# EAGLE board 13610-SparkFun_ESP32_Power_Control_Shield-.v10-panel (EAGLE 7.5.0), part 1 of 2
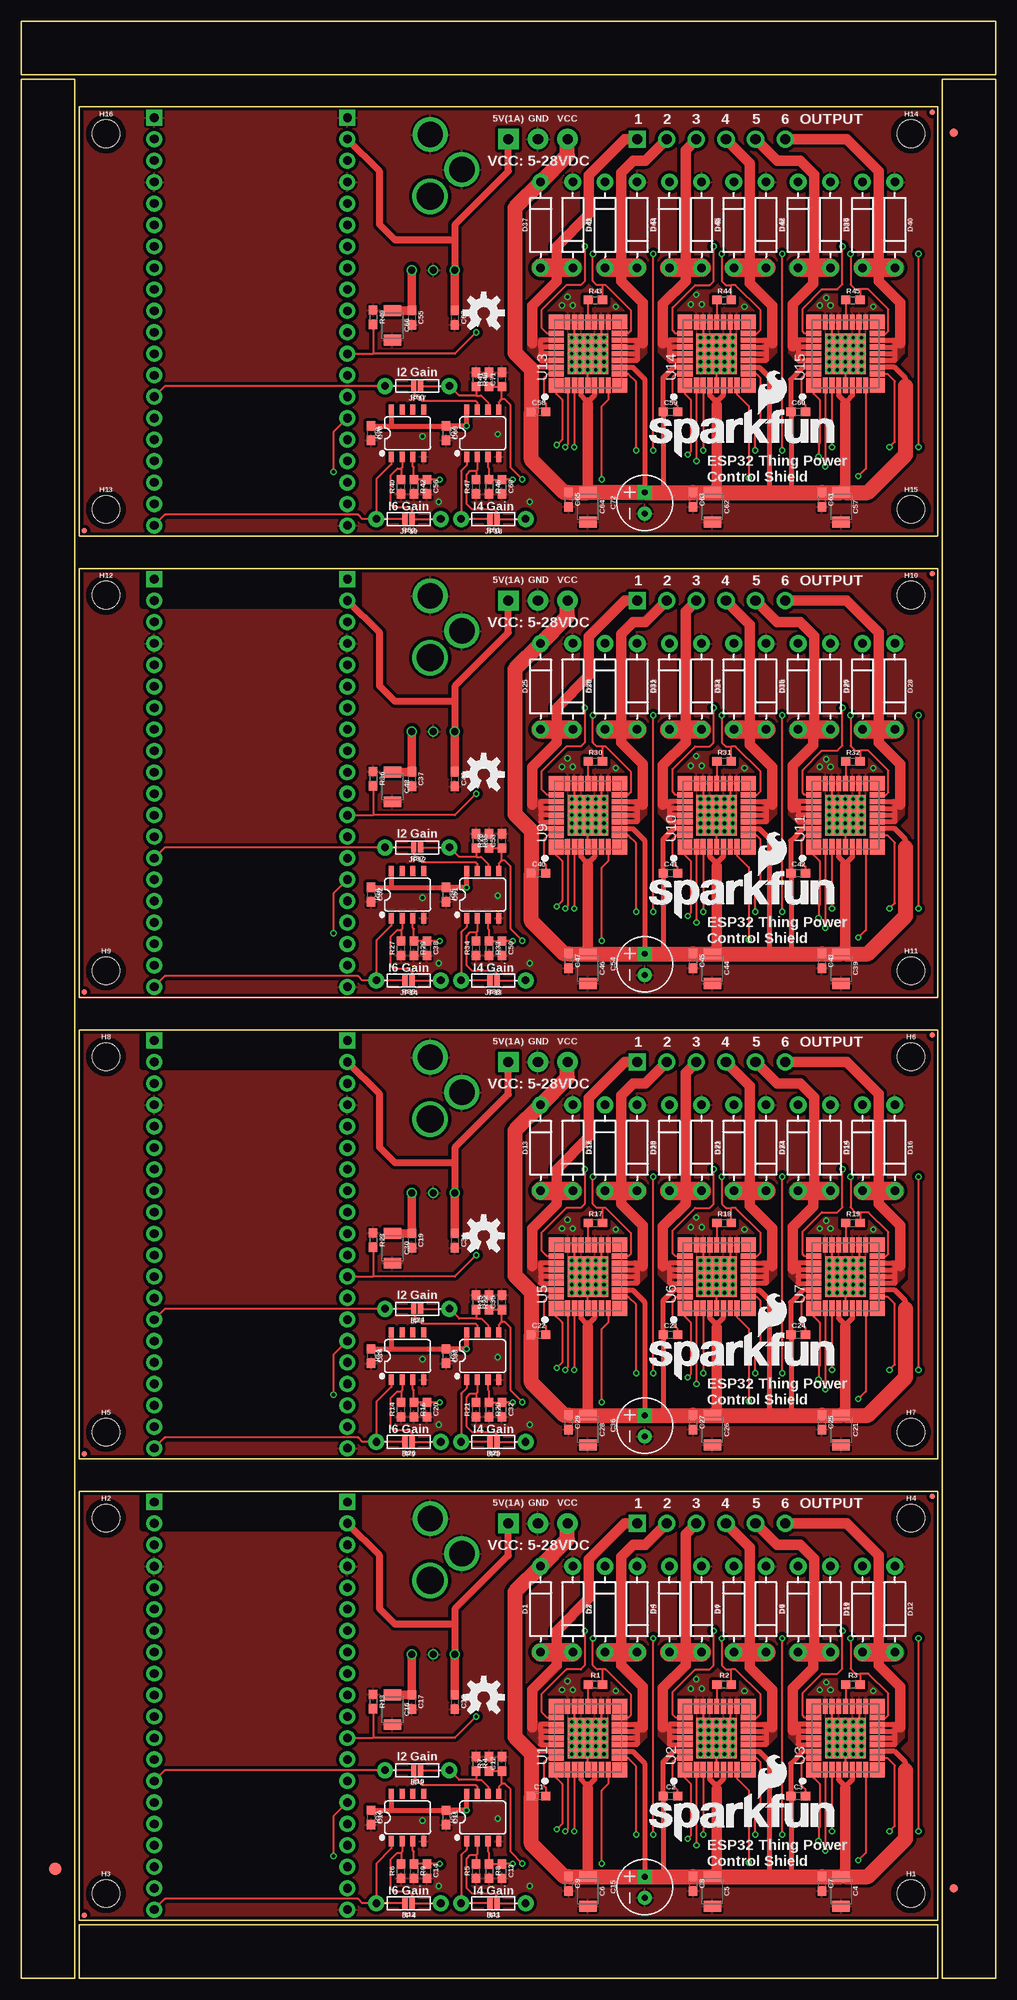
[diagram p0: board, top side]
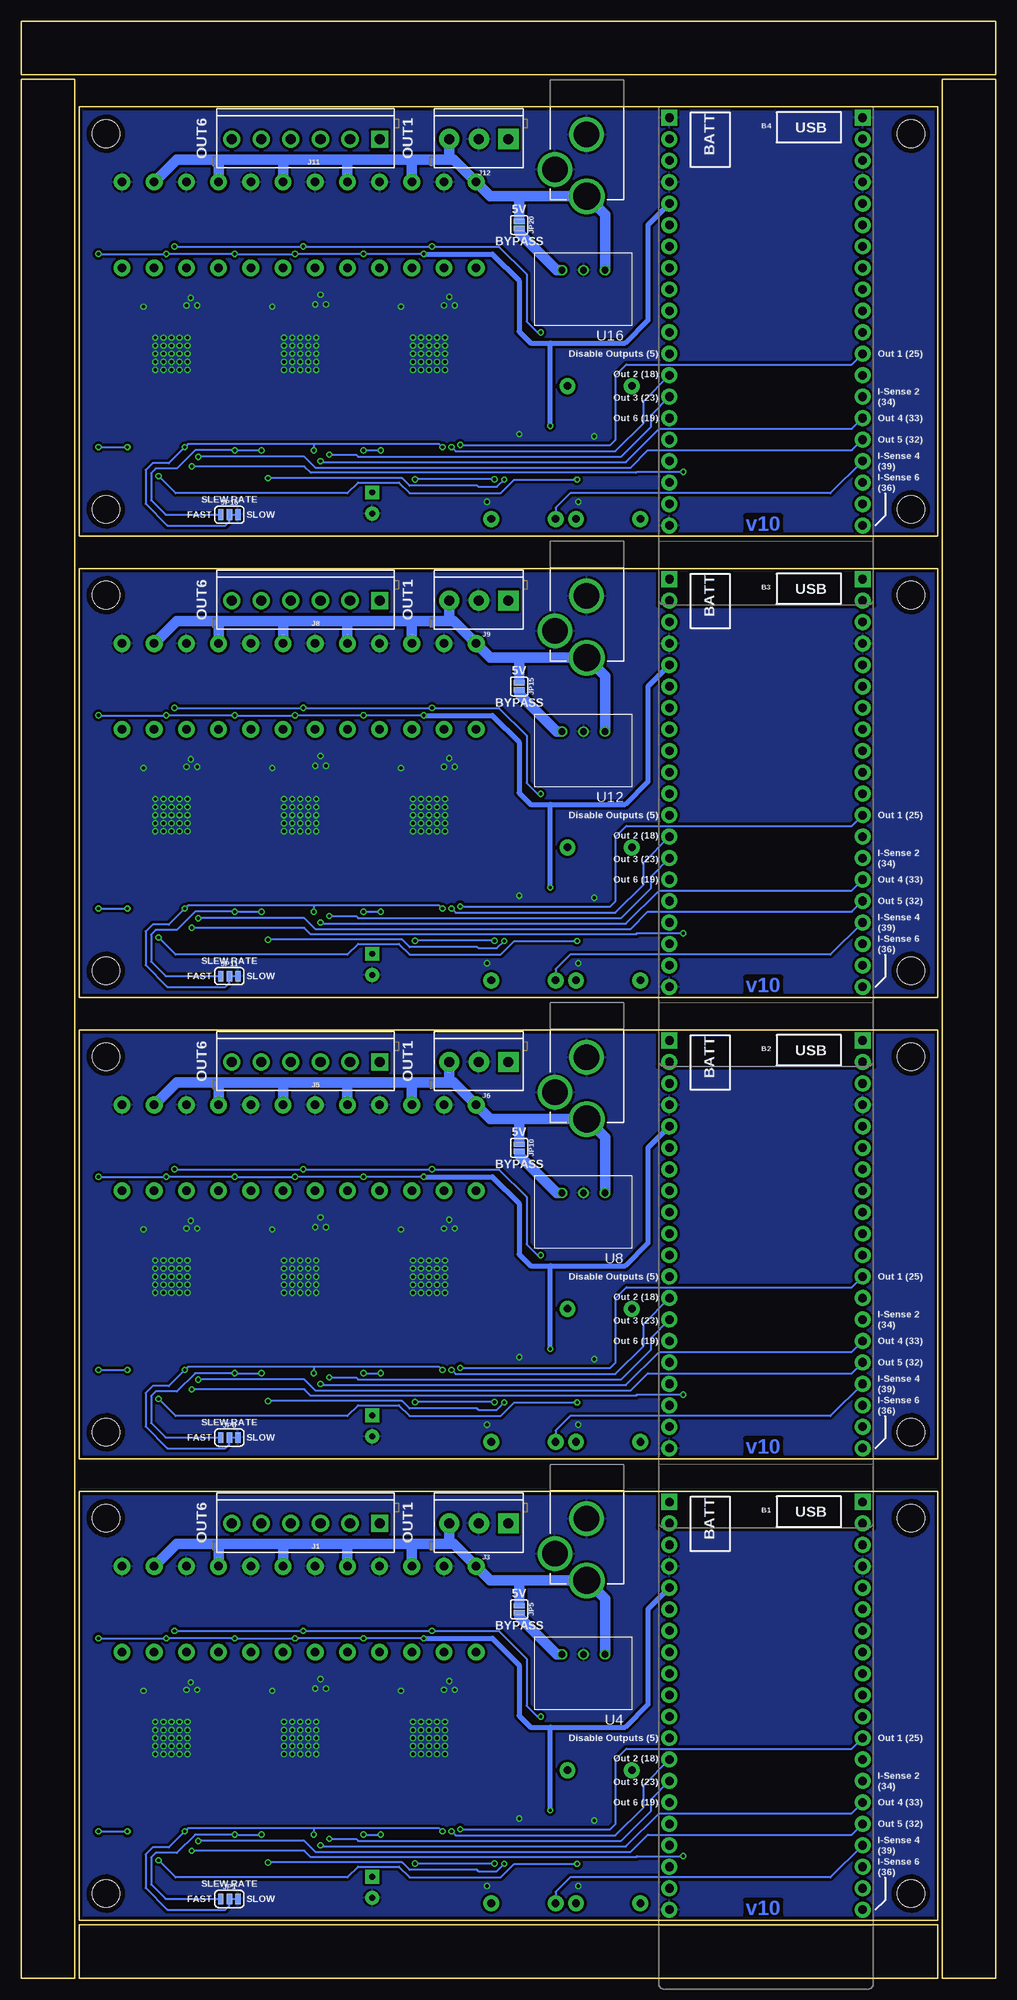
[diagram p1: board, bottom side, seen from below]

Size 115.32 x 231.65 mm. Coordinates in mm from the lower left corner, seen from the top.
Outline: 6.35,77.47 6.35,0 0,0 0,27.94
Outline: 0,25.4 0,224.79 6.35,224.79 6.35,74.93
Outline: 79.25,0 6.86,0 6.86,6.35 29.72,6.35
Outline: 27.18,6.35 108.46,6.35 108.46,0 76.71,0
Outline: 36.07,231.65 115.32,231.65 115.32,225.3 85.6,225.3
Outline: 88.14,225.3 0,225.3 0,231.65 38.61,231.65
Outline: 108.97,159.26 108.97,224.79 115.32,224.79 115.32,208.79
Outline: 115.32,211.33 115.32,0 108.97,0 108.97,161.8
Outline: 6.86,6.86 108.46,6.86 108.46,57.66 6.86,57.66 6.86,6.86
Outline: 6.86,61.47 108.46,61.47 108.46,112.27 6.86,112.27 6.86,61.47
Outline: 6.86,116.08 108.46,116.08 108.46,166.88 6.86,166.88 6.86,116.08
Outline: 6.86,170.69 108.46,170.69 108.46,221.49 6.86,221.49 6.86,170.69
Copper layers (1*16): Top 0.035mm / dielectric 1.5mm / Bottom 0.035mm
Design rules "SparkFun-2-layer-TIGHT": minimum track width 7mil, minimum drill 15mil, track to track 7mil, track to pad 7mil, pad to pad 7mil, via to via 7mil, smd to smd 7mil, copper to edge 7mil, drill to drill 7mil, minimum pad ring 7mil, minimum via ring 7mil, stop-mask expansion 4mil, vias tented up to drill 25mil, thermal gap 10mil

## Footprints (pad centres in the part's own frame; a part is rotated, then mirrored left to right if it is on the bottom)
ESP32_THING = drill 1.016 pad 1.88 square: 1 1.27,1.27; 40 24.13,1.27 | drill 1.016 pad 1.88: 2 1.27,3.81; 3 1.27,6.35; 4 1.27,8.89; 5 1.27,11.43; 6 1.27,13.97; 7 1.27,16.51; 8 1.27,19.05; 9 1.27,21.59; 10 1.27,24.13; 11 1.27,26.67; 12 1.27,29.21; 13 1.27,31.75; 14 1.27,34.29; 15 1.27,36.83; 16 1.27,39.37; 17 1.27,41.91; 18 1.27,44.45; 19 1.27,46.99; 20 1.27,49.53; 21 24.13,49.53; 22 24.13,46.99; 23 24.13,44.45; 24 24.13,41.91; 25 24.13,39.37; 26 24.13,36.83; 27 24.13,34.29; 28 24.13,31.75; 29 24.13,29.21; 30 24.13,26.67; 31 24.13,24.13; 32 24.13,21.59; 33 24.13,19.05; 34 24.13,16.51; 35 24.13,13.97; 36 24.13,11.43; 37 24.13,8.89; 38 24.13,6.35; 39 24.13,3.81
0603 = smd 1.1 x 1: 1 -0.85,0; 2 0.85,0
1210 = smd 1.27 x 2.06: 1 -1.755,0; 2 1.755,0
CPOL-RADIAL-2.5MM-6.5MM = drill 0.7 pad 1.651 square: 1 1.25,0 | drill 0.7 pad 1.651: 2 -1.25,0
DIODE-1N4001 = drill 1 pad 1.981: A -5.08,0; C 5.08,0
FIDUCIAL-1.5X3 = smd 1.5 x 1.5: 1 0,0
FIDUCIAL-1X2 = smd 1 x 1: 1 0,0
FIDUCIAL-MICRO = smd 0.635 x 0.635: 1 0,0
STAND-OFF = hole 3.302: 0,0
SO08 = smd 0.6 x 1.2: 1 -1.905,-2.8; 2 -0.635,-2.8; 3 0.635,-2.8; 4 1.905,-2.8; 5 1.905,2.8; 6 0.635,2.8; 7 -0.635,2.8; 8 -1.905,2.8
SCREWTERMINAL-3.5MM-6 = drill 1.2 pad 2.032 square: 1 0,0 | drill 1.2 pad 2.032: 2 3.5,0; 3 7,0; 4 10.5,0; 5 14,0; 6 17.5,0
POWER_JACK_PTH_LOCK = drill 2.997 pad 4.115: GND 0.025,6.557; GNDBREAK 3.762,10.7 | drill 3.2 pad 4.115: PWR 0,13.878
SCREWTERMINAL-3.5MM-3 = drill 1.2 pad 2.413 square: 1 0,0 | drill 1.2 pad 2.413: 2 3.5,0; 3 7,0
SMT-JUMPER_3_1-NC_TRACE_SILK = smd 0.635 x 1.27: 1 -1.016,0; 2 0,0; 3 1.016,0
SMT-JUMPER_2_NC_PASTE_NO-SILK = smd 0.635 x 1.27: 1 -0.406,0; 2 0.406,0
SMT-JUMPER_2_NO_SILK = smd 0.635 x 1.27: 1 -0.406,0; 2 0.406,0
AXIAL-0.3 = drill 0.9 pad 1.88: P$1 -3.81,0; P$2 3.81,0
32-PQFN = smd 1.75 x 1.75: P$1 -3.754,3.753; P$9 -3.754,-3.767; P$17 3.766,-3.767; P$25 3.766,3.753 | smd 1.8 x 0.635: P$2 -3.74,2.393; P$3 -3.74,1.593; P$4 -3.74,0.793; P$5 -3.74,-0.007; P$6 -3.74,-0.807; P$7 -3.74,-1.607; P$8 -3.74,-2.407; P$18 3.752,-2.407; P$19 3.752,-1.607; P$20 3.752,-0.807; P$21 3.752,-0.007; P$22 3.752,0.793; P$23 3.752,1.593; P$24 3.752,2.393 | smd 0.635 x 1.8: P$10 -2.394,-3.753; P$11 -1.594,-3.753; P$12 -0.794,-3.753; P$13 0.006,-3.753; P$14 0.806,-3.753; P$15 1.606,-3.753; P$16 2.406,-3.753; P$26 2.406,3.739; P$27 1.606,3.739; P$28 0.806,3.739; P$29 0.006,3.739; P$30 -0.794,3.739; P$31 -1.594,3.739; P$32 -2.394,3.739 | smd 4.8 x 4.8: P$33 0.006,-0.007
DC-DC_CONVERTER_78XX = drill 0.8: GND 0,0; VIN -2.54,0; VOUT 2.54,0

## Placement (x,y rotation side)
B1  ESP32_THING  [ESP32_THING]  14.48,57.66 180 bottom
B2  ESP32_THING  [ESP32_THING]  14.48,112.27 180 bottom
B3  ESP32_THING  [ESP32_THING]  14.48,166.88 180 bottom
B4  ESP32_THING  [ESP32_THING]  14.48,221.49 180 bottom
C1  33nF  [0603]  61.21,21.59 0 top
C2  33nF  [0603]  76.83,21.59 0 top
C3  33nF  [0603]  91.95,21.59 0 top
C4  10uF  [1210]  97.03,10.29 270 top
C5  10uF  [1210]  81.79,10.29 270 top
C6  10uF  [1210]  67.06,10.29 270 top
C7  0.1uF  [0603]  94.74,11.19 270 top
C8  0.1uF  [0603]  79.5,11.19 270 top
C9  0.1uF  [0603]  64.77,11.19 270 top
C10  0.1uF  [0603]  41.4,19.05 270 top
C11  0.1uF  [0603]  50.29,19.05 270 top
C12  1.0uF  [0603]  56.9,25.4 90 top
C13  1.0uF  [0603]  56.9,12.7 270 top
C14  1.0uF  [0603]  48.01,12.7 270 top
C15  Ext.  [CPOL-RADIAL-2.5MM-6.5MM]  73.79,10.79 90 top
C16  10uF  [1210]  43.94,31.8 270 top
C17  0.1uF  [0603]  46.23,32.72 270 top
C18  0.1uF  [0603]  51.31,32.72 270 top
C19  0.1uF  [0603]  46.23,87.33 270 top
C20  1.0uF  [0603]  48.01,67.31 270 top
C21  10uF  [1210]  97.03,64.9 270 top
C22  33nF  [0603]  61.21,76.2 0 top
C23  33nF  [0603]  76.83,76.2 0 top
C24  33nF  [0603]  91.95,76.2 0 top
C25  0.1uF  [0603]  94.74,65.8 270 top
C26  10uF  [1210]  81.79,64.9 270 top
C27  0.1uF  [0603]  79.5,65.8 270 top
C28  10uF  [1210]  67.06,64.9 270 top
C29  0.1uF  [0603]  64.77,65.8 270 top
C30  10uF  [1210]  43.94,86.41 270 top
C31  0.1uF  [0603]  51.31,87.33 270 top
C32  1.0uF  [0603]  56.9,67.31 270 top
C33  0.1uF  [0603]  50.29,73.66 270 top
C34  0.1uF  [0603]  41.4,73.66 270 top
C35  1.0uF  [0603]  56.9,80.01 90 top
C36  Ext.  [CPOL-RADIAL-2.5MM-6.5MM]  73.79,65.41 90 top
C37  0.1uF  [0603]  46.23,141.94 270 top
C38  1.0uF  [0603]  48.01,121.92 270 top
C39  10uF  [1210]  97.03,119.51 270 top
C40  33nF  [0603]  61.21,130.81 0 top
C41  33nF  [0603]  76.83,130.81 0 top
C42  33nF  [0603]  91.95,130.81 0 top
C43  0.1uF  [0603]  94.74,120.41 270 top
C44  10uF  [1210]  81.79,119.51 270 top
C45  0.1uF  [0603]  79.5,120.41 270 top
C46  10uF  [1210]  67.06,119.51 270 top
C47  0.1uF  [0603]  64.77,120.41 270 top
C48  10uF  [1210]  43.94,141.02 270 top
C49  0.1uF  [0603]  51.31,141.94 270 top
C50  1.0uF  [0603]  56.9,121.92 270 top
C51  0.1uF  [0603]  50.29,128.27 270 top
C52  0.1uF  [0603]  41.4,128.27 270 top
C53  1.0uF  [0603]  56.9,134.62 90 top
C54  Ext.  [CPOL-RADIAL-2.5MM-6.5MM]  73.79,120.02 90 top
C55  0.1uF  [0603]  46.23,196.55 270 top
C56  1.0uF  [0603]  48.01,176.53 270 top
C57  10uF  [1210]  97.03,174.12 270 top
C58  33nF  [0603]  61.21,185.42 0 top
C59  33nF  [0603]  76.83,185.42 0 top
C60  33nF  [0603]  91.95,185.42 0 top
C61  0.1uF  [0603]  94.74,175.02 270 top
C62  10uF  [1210]  81.79,174.12 270 top
C63  0.1uF  [0603]  79.5,175.02 270 top
C64  10uF  [1210]  67.06,174.12 270 top
C65  0.1uF  [0603]  64.77,175.02 270 top
C66  10uF  [1210]  43.94,195.63 270 top
C67  0.1uF  [0603]  51.31,196.55 270 top
C68  1.0uF  [0603]  56.9,176.53 270 top
C69  0.1uF  [0603]  50.29,182.88 270 top
C70  0.1uF  [0603]  41.4,182.88 270 top
C71  1.0uF  [0603]  56.9,189.23 90 top
C72  Ext.  [CPOL-RADIAL-2.5MM-6.5MM]  73.79,174.62 90 top
D1  1N4001  [DIODE-1N4001]  61.47,43.69 90 top
D2  1N4001  [DIODE-1N4001]  65.28,43.69 270 top
D3  1N4001  [DIODE-1N4001]  69.09,43.69 90 top
D4  1N4001  [DIODE-1N4001]  72.9,43.69 270 top
D5  1N4001  [DIODE-1N4001]  76.71,43.69 90 top
D6  1N4001  [DIODE-1N4001]  80.52,43.69 270 top
D7  1N4001  [DIODE-1N4001]  84.33,43.69 90 top
D8  1N4001  [DIODE-1N4001]  88.14,43.69 270 top
D9  1N4001  [DIODE-1N4001]  91.95,43.69 90 top
D10  1N4001  [DIODE-1N4001]  95.76,43.69 270 top
D11  1N4001  [DIODE-1N4001]  99.57,43.69 90 top
D12  1N4001  [DIODE-1N4001]  103.38,43.69 270 top
D13  1N4001  [DIODE-1N4001]  61.47,98.3 90 top
D14  1N4001  [DIODE-1N4001]  95.76,98.3 270 top
D15  1N4001  [DIODE-1N4001]  99.57,98.3 90 top
D16  1N4001  [DIODE-1N4001]  103.38,98.3 270 top
D17  1N4001  [DIODE-1N4001]  65.28,98.3 270 top
D18  1N4001  [DIODE-1N4001]  69.09,98.3 90 top
D19  1N4001  [DIODE-1N4001]  72.9,98.3 270 top
D20  1N4001  [DIODE-1N4001]  76.71,98.3 90 top
D21  1N4001  [DIODE-1N4001]  80.52,98.3 270 top
D22  1N4001  [DIODE-1N4001]  84.33,98.3 90 top
D23  1N4001  [DIODE-1N4001]  88.14,98.3 270 top
D24  1N4001  [DIODE-1N4001]  91.95,98.3 90 top
D25  1N4001  [DIODE-1N4001]  61.47,152.91 90 top
D26  1N4001  [DIODE-1N4001]  95.76,152.91 270 top
D27  1N4001  [DIODE-1N4001]  99.57,152.91 90 top
D28  1N4001  [DIODE-1N4001]  103.38,152.91 270 top
D29  1N4001  [DIODE-1N4001]  65.28,152.91 270 top
D30  1N4001  [DIODE-1N4001]  69.09,152.91 90 top
D31  1N4001  [DIODE-1N4001]  72.9,152.91 270 top
D32  1N4001  [DIODE-1N4001]  76.71,152.91 90 top
D33  1N4001  [DIODE-1N4001]  80.52,152.91 270 top
D34  1N4001  [DIODE-1N4001]  84.33,152.91 90 top
D35  1N4001  [DIODE-1N4001]  88.14,152.91 270 top
D36  1N4001  [DIODE-1N4001]  91.95,152.91 90 top
D37  1N4001  [DIODE-1N4001]  61.47,207.52 90 top
D38  1N4001  [DIODE-1N4001]  95.76,207.52 270 top
D39  1N4001  [DIODE-1N4001]  99.57,207.52 90 top
D40  1N4001  [DIODE-1N4001]  103.38,207.52 270 top
D41  1N4001  [DIODE-1N4001]  65.28,207.52 270 top
D42  1N4001  [DIODE-1N4001]  69.09,207.52 90 top
D43  1N4001  [DIODE-1N4001]  72.9,207.52 270 top
D44  1N4001  [DIODE-1N4001]  76.71,207.52 90 top
D45  1N4001  [DIODE-1N4001]  80.52,207.52 270 top
D46  1N4001  [DIODE-1N4001]  84.33,207.52 90 top
D47  1N4001  [DIODE-1N4001]  88.14,207.52 270 top
D48  1N4001  [DIODE-1N4001]  91.95,207.52 90 top
E$1  [FIDUCIAL-1.5X3]  4.06,12.95 0 top
E$7  [FIDUCIAL-1X2]  110.36,218.44 180 top
E$8  [FIDUCIAL-1X2]  110.36,10.67 0 top
FD1  FIDUCIALUFIDUCIAL  [FIDUCIAL-MICRO]  107.82,57.02 0 top
FD2  FIDUCIALUFIDUCIAL  [FIDUCIAL-MICRO]  7.49,7.49 0 top
FD3  FIDUCIALUFIDUCIAL  [FIDUCIAL-MICRO]  107.82,111.63 0 top
FD4  FIDUCIALUFIDUCIAL  [FIDUCIAL-MICRO]  7.49,62.1 0 top
FD5  FIDUCIALUFIDUCIAL  [FIDUCIAL-MICRO]  107.82,166.24 0 top
FD6  FIDUCIALUFIDUCIAL  [FIDUCIAL-MICRO]  7.49,116.71 0 top
FD7  FIDUCIALUFIDUCIAL  [FIDUCIAL-MICRO]  107.82,220.85 0 top
FD8  FIDUCIALUFIDUCIAL  [FIDUCIAL-MICRO]  7.49,171.32 0 top
H1  STAND-OFF  [STAND-OFF]  105.28,10.03 0 top
H2  STAND-OFF  [STAND-OFF]  10.03,54.48 0 top
H3  STAND-OFF  [STAND-OFF]  10.03,10.03 0 top
H4  STAND-OFF  [STAND-OFF]  105.28,54.48 0 top
H5  STAND-OFF  [STAND-OFF]  10.03,64.64 0 top
H6  STAND-OFF  [STAND-OFF]  105.28,109.09 0 top
H7  STAND-OFF  [STAND-OFF]  105.28,64.64 0 top
H8  STAND-OFF  [STAND-OFF]  10.03,109.09 0 top
H9  STAND-OFF  [STAND-OFF]  10.03,119.25 0 top
H10  STAND-OFF  [STAND-OFF]  105.28,163.7 0 top
H11  STAND-OFF  [STAND-OFF]  105.28,119.25 0 top
H12  STAND-OFF  [STAND-OFF]  10.03,163.7 0 top
H13  STAND-OFF  [STAND-OFF]  10.03,173.86 0 top
H14  STAND-OFF  [STAND-OFF]  105.28,218.31 0 top
H15  STAND-OFF  [STAND-OFF]  105.28,173.86 0 top
H16  STAND-OFF  [STAND-OFF]  10.03,218.31 0 top
IC1  LMV358  [SO08]  54.61,19.05 0 top
IC2  LMV358  [SO08]  45.72,19.05 0 top
IC3  LMV358  [SO08]  54.61,73.66 0 top
IC4  LMV358  [SO08]  45.72,73.66 0 top
IC5  LMV358  [SO08]  54.61,128.27 0 top
IC6  LMV358  [SO08]  45.72,128.27 0 top
IC7  LMV358  [SO08]  54.61,182.88 0 top
IC8  LMV358  [SO08]  45.72,182.88 0 top
J1  [SCREWTERMINAL-3.5MM-6]  72.9,53.85 180 bottom
J2  POWER_JACKPTH_LOCK  [POWER_JACK_PTH_LOCK]  48.39,60.96 180 bottom
J3  [SCREWTERMINAL-3.5MM-3]  57.66,53.85 180 bottom
J4  POWER_JACKPTH_LOCK  [POWER_JACK_PTH_LOCK]  48.39,115.57 180 bottom
J5  [SCREWTERMINAL-3.5MM-6]  72.9,108.46 180 bottom
J6  [SCREWTERMINAL-3.5MM-3]  57.66,108.46 180 bottom
J7  POWER_JACKPTH_LOCK  [POWER_JACK_PTH_LOCK]  48.39,170.18 180 bottom
J8  [SCREWTERMINAL-3.5MM-6]  72.9,163.07 180 bottom
J9  [SCREWTERMINAL-3.5MM-3]  57.66,163.07 180 bottom
J10  POWER_JACKPTH_LOCK  [POWER_JACK_PTH_LOCK]  48.39,224.79 180 bottom
J11  [SCREWTERMINAL-3.5MM-6]  72.9,217.68 180 bottom
J12  [SCREWTERMINAL-3.5MM-3]  57.66,217.68 180 bottom
JP1  [SMT-JUMPER_3_1-NC_TRACE_SILK]  90.68,9.4 0 bottom
JP2  [SMT-JUMPER_2_NC_PASTE_NO-SILK]  46.86,24.64 180 top
JP3  [SMT-JUMPER_2_NC_PASTE_NO-SILK]  55.88,8.89 180 top
JP4  [SMT-JUMPER_2_NC_PASTE_NO-SILK]  45.85,8.89 180 top
JP5  5V Bypass  [SMT-JUMPER_2_NO_SILK]  56.39,43.69 270 bottom
JP6  [SMT-JUMPER_3_1-NC_TRACE_SILK]  90.68,64.01 0 bottom
JP7  [SMT-JUMPER_2_NC_PASTE_NO-SILK]  46.86,79.25 180 top
JP8  [SMT-JUMPER_2_NC_PASTE_NO-SILK]  55.88,63.5 180 top
JP9  [SMT-JUMPER_2_NC_PASTE_NO-SILK]  45.85,63.5 180 top
JP10  5V Bypass  [SMT-JUMPER_2_NO_SILK]  56.39,98.3 270 bottom
JP11  [SMT-JUMPER_3_1-NC_TRACE_SILK]  90.68,118.62 0 bottom
JP12  [SMT-JUMPER_2_NC_PASTE_NO-SILK]  46.86,133.86 180 top
JP13  [SMT-JUMPER_2_NC_PASTE_NO-SILK]  55.88,118.11 180 top
JP14  [SMT-JUMPER_2_NC_PASTE_NO-SILK]  45.85,118.11 180 top
JP15  5V Bypass  [SMT-JUMPER_2_NO_SILK]  56.39,152.91 270 bottom
JP16  [SMT-JUMPER_3_1-NC_TRACE_SILK]  90.68,173.23 0 bottom
JP17  [SMT-JUMPER_2_NC_PASTE_NO-SILK]  46.86,188.47 180 top
JP18  [SMT-JUMPER_2_NC_PASTE_NO-SILK]  55.88,172.72 180 top
JP19  [SMT-JUMPER_2_NC_PASTE_NO-SILK]  45.85,172.72 180 top
JP20  5V Bypass  [SMT-JUMPER_2_NO_SILK]  56.39,207.52 270 bottom
LOGO1  SFE_LOGO_NAME_FLAME.2_INCH  [SFE_LOGO_NAME_FLAME_.2]  73.66,16.13 0 top
LOGO2  OSHW-LOGOM  [OSHW-LOGO-M]  54.74,33.27 0 top
LOGO3  SFE_LOGO_NAME_FLAME.2_INCH  [SFE_LOGO_NAME_FLAME_.2]  73.66,70.74 0 top
LOGO4  OSHW-LOGOM  [OSHW-LOGO-M]  54.74,87.88 0 top
LOGO5  SFE_LOGO_NAME_FLAME.2_INCH  [SFE_LOGO_NAME_FLAME_.2]  73.66,125.35 0 top
LOGO6  OSHW-LOGOM  [OSHW-LOGO-M]  54.74,142.49 0 top
LOGO7  SFE_LOGO_NAME_FLAME.2_INCH  [SFE_LOGO_NAME_FLAME_.2]  73.66,179.96 0 top
LOGO8  OSHW-LOGOM  [OSHW-LOGO-M]  54.74,197.1 0 top
R1  10k  [0603]  67.94,34.8 0 top
R2  10k  [0603]  83.19,34.8 0 top
R3  10k  [0603]  98.42,34.8 0 top
R4  10k  [0603]  53.85,25.4 270 top
R5  10k  [0603]  53.85,12.7 90 top
R6  10k  [0603]  44.96,12.7 90 top
R7  220  [0603]  55.37,25.4 90 top
R8  220  [0603]  55.37,12.7 270 top
R9  220  [0603]  46.48,12.7 270 top
R10  [AXIAL-0.3]  46.86,24.64 180 top
R11  [AXIAL-0.3]  55.88,8.89 180 top
R12  [AXIAL-0.3]  45.85,8.89 180 top
R13  10k  [0603]  41.66,32.77 270 top
R14  10k  [0603]  44.96,67.31 90 top
R15  220  [0603]  55.37,80.01 90 top
R16  220  [0603]  46.48,67.31 270 top
R17  10k  [0603]  67.94,89.41 0 top
R18  10k  [0603]  83.19,89.41 0 top
R19  10k  [0603]  98.42,89.41 0 top
R20  220  [0603]  55.37,67.31 270 top
R21  10k  [0603]  53.85,67.31 90 top
R22  10k  [0603]  53.85,80.01 270 top
R23  10k  [0603]  41.66,87.38 270 top
R24  [AXIAL-0.3]  46.86,79.25 180 top
R25  [AXIAL-0.3]  55.88,63.5 180 top
R26  [AXIAL-0.3]  45.85,63.5 180 top
R27  10k  [0603]  44.96,121.92 90 top
R28  220  [0603]  55.37,134.62 90 top
R29  220  [0603]  46.48,121.92 270 top
R30  10k  [0603]  67.94,144.02 0 top
R31  10k  [0603]  83.19,144.02 0 top
R32  10k  [0603]  98.42,144.02 0 top
R33  220  [0603]  55.37,121.92 270 top
R34  10k  [0603]  53.85,121.92 90 top
R35  10k  [0603]  53.85,134.62 270 top
R36  10k  [0603]  41.66,141.99 270 top
R37  [AXIAL-0.3]  46.86,133.86 180 top
R38  [AXIAL-0.3]  55.88,118.11 180 top
R39  [AXIAL-0.3]  45.85,118.11 180 top
R40  10k  [0603]  44.96,176.53 90 top
R41  220  [0603]  55.37,189.23 90 top
R42  220  [0603]  46.48,176.53 270 top
R43  10k  [0603]  67.94,198.63 0 top
R44  10k  [0603]  83.19,198.63 0 top
R45  10k  [0603]  98.42,198.63 0 top
R46  220  [0603]  55.37,176.53 270 top
R47  10k  [0603]  53.85,176.53 90 top
R48  10k  [0603]  53.85,189.23 270 top
R49  10k  [0603]  41.66,196.6 270 top
R50  [AXIAL-0.3]  46.86,188.47 180 top
R51  [AXIAL-0.3]  55.88,172.72 180 top
R52  [AXIAL-0.3]  45.85,172.72 180 top
U1  MC33926  [32-PQFN]  67.06,28.45 90 top
U2  MC33926  [32-PQFN]  82.3,28.45 90 top
U3  MC33926  [32-PQFN]  97.54,28.45 90 top
U4  R-78E5.0-1.0  [DC-DC_CONVERTER_78XX]  48.77,38.35 180 bottom
U5  MC33926  [32-PQFN]  67.06,83.06 90 top
U6  MC33926  [32-PQFN]  82.3,83.06 90 top
U7  MC33926  [32-PQFN]  97.54,83.06 90 top
U8  R-78E5.0-1.0  [DC-DC_CONVERTER_78XX]  48.77,92.96 180 bottom
U9  MC33926  [32-PQFN]  67.06,137.67 90 top
U10  MC33926  [32-PQFN]  82.3,137.67 90 top
U11  MC33926  [32-PQFN]  97.54,137.67 90 top
U12  R-78E5.0-1.0  [DC-DC_CONVERTER_78XX]  48.77,147.57 180 bottom
U13  MC33926  [32-PQFN]  67.06,192.28 90 top
U14  MC33926  [32-PQFN]  82.3,192.28 90 top
U15  MC33926  [32-PQFN]  97.54,192.28 90 top
U16  R-78E5.0-1.0  [DC-DC_CONVERTER_78XX]  48.77,202.18 180 bottom

## Library data of the parts
B1-B4 = SparkFun-Boards; SF_ID: DEV-13907
C1-C3 C22-C24 C40-C42 C58-C60 = SparkFun-Capacitors; PROD_ID: CAP-07887
C4-C6 C16 C21 C26 C28 C30 C39 C44 C46 C48 C57 C62 C64 C66 = SparkFun-Capacitors; PROD_ID: CAP-09824
C7-C11 C17-C19 C25 C27 C29 C31 C33 C34 C37 C43 C45 C47 C49 C51 C52 C55 C61 C63 C65 C67 C69 C70 = SparkFun-Capacitors; PROD_ID: CAP-08390
C12-C14 C20 C32 C35 C38 C50 C53 C56 C68 C71 = SparkFun-Capacitors; PROD_ID: CAP-00868
C15 C36 C54 C72 = SparkFun-Capacitors; PROD_ID: CAP-08439
D1-D48 = SparkFun-DiscreteSemi; PROD_ID: DIO-09176
E$1 = SparkFun-Retired
E$7 E$8 FD1-FD8 LOGO1-LOGO8 = SparkFun-Aesthetics
H1-H16 = SparkFun-Hardware
IC1-IC8 = SparkFun-IC-Amplifiers; PROD_ID: IC-09657
J1 J5 J8 J11 = SparkFun-Connectors; PROD_ID: CONN-13617
J2 J4 J7 J10 = SparkFun-Connectors; PROD_ID: CONN-08197; SF_ID: PRT-00119
J3 J6 J9 J12 = SparkFun-Connectors; PROD_ID: CONN-08288; SF_ID: PRT-08235
JP1-JP20 = SparkFun-Jumpers
R1-R6 R13 R14 R17-R19 R21-R23 R27 R30-R32 R34-R36 R40 R43-R45 R47-R49 = SparkFun-Resistors; PROD_ID: RES-00824
R7-R9 R15 R16 R20 R28 R29 R33 R41 R42 R46 = SparkFun-Resistors; PROD_ID: RES-07861
R10-R12 R24-R26 R37-R39 R50-R52 = SparkFun-Resistors; PROD_ID: RES-12182
U1-U3 U5-U7 U9-U11 U13-U15 = SparkFun_ESP32_Power_Control_Shield_Temp; PROD_ID: IC-13616
U4 U8 U12 U16 = SparkFun-IC-Power; PROD_ID: COM-13655

## Nets
3.3V: B1.36 C10.1 C11.1 IC1.8 IC2.8 JP1.1 R1.2 R2.2 R3.2 U1.P$10 U1.P$16 U2.P$10 U2.P$16 U3.P$10 U3.P$16
3.3V1: B2.36 C33.1 C34.1 IC3.8 IC4.8 JP6.1 R17.2 R18.2 R19.2 U5.P$10 U5.P$16 U6.P$10 U6.P$16 U7.P$10 U7.P$16
3.3V2: B3.36 C51.1 C52.1 IC5.8 IC6.8 JP11.1 R30.2 R31.2 R32.2 U9.P$10 U9.P$16 U10.P$10 U10.P$16 U11.P$10 U11.P$16
3.3V3: B4.36 C69.1 C70.1 IC7.8 IC8.8 JP16.1 R43.2 R44.2 R45.2 U13.P$10 U13.P$16 U14.P$10 U14.P$16 U15.P$10 U15.P$16
5V: B1.39 C18.1 J3.1 JP5.2 U4.VOUT
5V1: B2.39 C31.1 J6.1 JP10.2 U8.VOUT
5V2: B3.39 C49.1 J9.1 JP15.2 U12.VOUT
5V3: B4.39 C67.1 J12.1 JP20.2 U16.VOUT
CTRL_1: B1.12 U1.P$1
CTRL_2: B1.28 U1.P$2
CTRL_3: B1.27 U2.P$1
CTRL_4: B1.15 U2.P$2
CTRL_5: B1.16 U3.P$1
CTRL_6: B1.26 U3.P$2
CTRL_7: B2.26 U7.P$2
CTRL_8: B2.16 U7.P$1
CTRL_9: B2.15 U6.P$2
CTRL_10: B2.27 U6.P$1
CTRL_11: B2.28 U5.P$2
CTRL_12: B2.12 U5.P$1
CTRL_13: B3.26 U11.P$2
CTRL_14: B3.16 U11.P$1
CTRL_15: B3.15 U10.P$2
CTRL_16: B3.27 U10.P$1
CTRL_17: B3.28 U9.P$2
CTRL_18: B3.12 U9.P$1
CTRL_19: B4.26 U15.P$2
CTRL_20: B4.16 U15.P$1
CTRL_21: B4.15 U14.P$2
CTRL_22: B4.27 U14.P$1
CTRL_23: B4.28 U13.P$2
CTRL_24: B4.12 U13.P$1
D1: B1.29 R13.2 U1.P$26 U2.P$26 U3.P$26
D2: B2.29 R23.2 U5.P$26 U6.P$26 U7.P$26
D3: B3.29 R36.2 U9.P$26 U10.P$26 U11.P$26
D4: B4.29 R49.2 U13.P$26 U14.P$26 U15.P$26
FB1: B2.20 IC4.1 JP9.2 R26.P$2
FB2: B1.14 IC1.7 JP2.2 R10.P$2
FB3: B2.17 IC3.1 JP8.2 R25.P$2
FB4: B1.17 IC1.1 JP3.2 R11.P$2
FB5: B2.14 IC3.7 JP7.2 R24.P$2
FB6: B1.20 IC2.1 JP4.2 R12.P$2
FB7: B3.20 IC6.1 JP14.2 R39.P$2
FB8: B3.17 IC5.1 JP13.2 R38.P$2
FB9: B3.14 IC5.7 JP12.2 R37.P$2
FB10: B4.20 IC8.1 JP19.2 R52.P$2
FB11: B4.17 IC7.1 JP18.2 R51.P$2
FB12: B4.14 IC7.7 JP17.2 R50.P$2
GND: B1.1 B1.4 B1.21 B1.37 B1.40 C4.2 C5.2 C6.2 C7.2 C8.2 C9.2 C10.2 C11.2 C12.2 C13.2 C14.2 C15.2 C16.2 C17.2 C18.2 D2.A D4.A D6.A D8.A D10.A D12.A IC1.4 IC2.4 J2.GND J2.GNDBREAK J3.2 JP1.3 R4.1 R5.1 R6.1 R7.2 R8.2 R9.2 R13.1 U1.P$5 U1.P$18 U1.P$19 U1.P$20 U1.P$22 U1.P$23 U1.P$24 U1.P$33 U2.P$5 U2.P$18 U2.P$19 U2.P$20 U2.P$22 U2.P$23 U2.P$24 U2.P$33 U3.P$5 U3.P$18 U3.P$19 U3.P$20 U3.P$22 U3.P$23 U3.P$24 U3.P$33 U4.GND
GND1: B2.1 B2.4 B2.21 B2.37 B2.40 C19.2 C20.2 C21.2 C25.2 C26.2 C27.2 C28.2 C29.2 C30.2 C31.2 C32.2 C33.2 C34.2 C35.2 C36.2 D14.A D16.A D17.A D19.A D21.A D23.A IC3.4 IC4.4 J4.GND J4.GNDBREAK J6.2 JP6.3 R14.1 R15.2 R16.2 R20.2 R21.1 R22.1 R23.1 U5.P$5 U5.P$18 U5.P$19 U5.P$20 U5.P$22 U5.P$23 U5.P$24 U5.P$33 U6.P$5 U6.P$18 U6.P$19 U6.P$20 U6.P$22 U6.P$23 U6.P$24 U6.P$33 U7.P$5 U7.P$18 U7.P$19 U7.P$20 U7.P$22 U7.P$23 U7.P$24 U7.P$33 U8.GND
GND2: B3.1 B3.4 B3.21 B3.37 B3.40 C37.2 C38.2 C39.2 C43.2 C44.2 C45.2 C46.2 C47.2 C48.2 C49.2 C50.2 C51.2 C52.2 C53.2 C54.2 D26.A D28.A D29.A D31.A D33.A D35.A IC5.4 IC6.4 J7.GND J7.GNDBREAK J9.2 JP11.3 R27.1 R28.2 R29.2 R33.2 R34.1 R35.1 R36.1 U9.P$5 U9.P$18 U9.P$19 U9.P$20 U9.P$22 U9.P$23 U9.P$24 U9.P$33 U10.P$5 U10.P$18 U10.P$19 U10.P$20 U10.P$22 U10.P$23 U10.P$24 U10.P$33 U11.P$5 U11.P$18 U11.P$19 U11.P$20 U11.P$22 U11.P$23 U11.P$24 U11.P$33 U12.GND
GND3: B4.1 B4.4 B4.21 B4.37 B4.40 C55.2 C56.2 C57.2 C61.2 C62.2 C63.2 C64.2 C65.2 C66.2 C67.2 C68.2 C69.2 C70.2 C71.2 C72.2 D38.A D40.A D41.A D43.A D45.A D47.A IC7.4 IC8.4 J10.GND J10.GNDBREAK J12.2 JP16.3 R40.1 R41.2 R42.2 R46.2 R47.1 R48.1 R49.1 U13.P$5 U13.P$18 U13.P$19 U13.P$20 U13.P$22 U13.P$23 U13.P$24 U13.P$33 U14.P$5 U14.P$18 U14.P$19 U14.P$20 U14.P$22 U14.P$23 U14.P$24 U14.P$33 U15.P$5 U15.P$18 U15.P$19 U15.P$20 U15.P$22 U15.P$23 U15.P$24 U15.P$33 U16.GND
I_SENSE1: C12.1 IC1.5 R7.1 U1.P$8
I_SENSE2: C13.1 IC1.3 R8.1 U2.P$8
I_SENSE3: C14.1 IC2.3 R9.1 U3.P$8
I_SENSE4: C35.1 IC3.5 R15.1 U5.P$8
I_SENSE5: C32.1 IC3.3 R20.1 U6.P$8
I_SENSE6: C20.1 IC4.3 R16.1 U7.P$8
I_SENSE7: C53.1 IC5.5 R28.1 U9.P$8
I_SENSE8: C50.1 IC5.3 R33.1 U10.P$8
I_SENSE9: C38.1 IC6.3 R29.1 U11.P$8
I_SENSE10: C71.1 IC7.5 R41.1 U13.P$8
I_SENSE11: C68.1 IC7.3 R46.1 U14.P$8
I_SENSE12: C56.1 IC8.3 R42.1 U15.P$8
N$1: R17.1 U5.P$21
N$2: IC1.6 JP2.1 R4.2 R10.P$1
N$3: C22.2 U5.P$32
N$4: IC2.2 JP4.1 R6.2 R12.P$1
N$5: IC1.2 JP3.1 R5.2 R11.P$1
N$6: R2.1 U2.P$21
N$7: C2.2 U2.P$32
N$8: R18.1 U6.P$21
N$9: R3.1 U3.P$21
N$10: R1.1 U1.P$21
N$11: C1.2 U1.P$32
N$12: C3.2 U3.P$32
N$13: C23.2 U6.P$32
N$14: R19.1 U7.P$21
N$15: C24.2 U7.P$32
N$16: IC3.2 JP8.1 R21.2 R25.P$1
N$17: IC3.6 JP7.1 R22.2 R24.P$1
N$18: IC4.2 JP9.1 R14.2 R26.P$1
N$19: R30.1 U9.P$21
N$20: C40.2 U9.P$32
N$21: R31.1 U10.P$21
N$22: C41.2 U10.P$32
N$23: R32.1 U11.P$21
N$24: C42.2 U11.P$32
N$25: IC5.2 JP13.1 R34.2 R38.P$1
N$26: IC5.6 JP12.1 R35.2 R37.P$1
N$27: IC6.2 JP14.1 R27.2 R39.P$1
N$28: R43.1 U13.P$21
N$29: C58.2 U13.P$32
N$30: R44.1 U14.P$21
N$31: C59.2 U14.P$32
N$32: R45.1 U15.P$21
N$33: C60.2 U15.P$32
N$34: IC7.2 JP18.1 R47.2 R51.P$1
N$35: IC7.6 JP17.1 R48.2 R50.P$1
N$36: IC8.2 JP19.1 R40.2 R52.P$1
P_OUT1: D1.A D2.C J1.1 U1.P$27 U1.P$28 U1.P$29 U1.P$30
P_OUT2: D3.A D4.C J1.2 U1.P$12 U1.P$13 U1.P$14 U1.P$15
P_OUT3: D5.A D6.C J1.3 U2.P$27 U2.P$28 U2.P$29 U2.P$30
P_OUT4: D7.A D8.C J1.4 U2.P$12 U2.P$13 U2.P$14 U2.P$15
P_OUT5: D9.A D10.C J1.5 U3.P$27 U3.P$28 U3.P$29 U3.P$30
P_OUT6: D11.A D12.C J1.6 U3.P$12 U3.P$13 U3.P$14 U3.P$15
P_OUT7: D18.A D19.C J5.2 U5.P$12 U5.P$13 U5.P$14 U5.P$15
P_OUT8: D22.A D23.C J5.4 U6.P$12 U6.P$13 U6.P$14 U6.P$15
P_OUT9: D15.A D16.C J5.6 U7.P$12 U7.P$13 U7.P$14 U7.P$15
P_OUT10: D13.A D17.C J5.1 U5.P$27 U5.P$28 U5.P$29 U5.P$30
P_OUT11: D14.C D24.A J5.5 U7.P$27 U7.P$28 U7.P$29 U7.P$30
P_OUT12: D20.A D21.C J5.3 U6.P$27 U6.P$28 U6.P$29 U6.P$30
P_OUT13: D30.A D31.C J8.2 U9.P$12 U9.P$13 U9.P$14 U9.P$15
P_OUT14: D34.A D35.C J8.4 U10.P$12 U10.P$13 U10.P$14 U10.P$15
P_OUT15: D27.A D28.C J8.6 U11.P$12 U11.P$13 U11.P$14 U11.P$15
P_OUT16: D25.A D29.C J8.1 U9.P$27 U9.P$28 U9.P$29 U9.P$30
P_OUT17: D26.C D36.A J8.5 U11.P$27 U11.P$28 U11.P$29 U11.P$30
P_OUT18: D32.A D33.C J8.3 U10.P$27 U10.P$28 U10.P$29 U10.P$30
P_OUT19: D42.A D43.C J11.2 U13.P$12 U13.P$13 U13.P$14 U13.P$15
P_OUT20: D46.A D47.C J11.4 U14.P$12 U14.P$13 U14.P$14 U14.P$15
P_OUT21: D39.A D40.C J11.6 U15.P$12 U15.P$13 U15.P$14 U15.P$15
P_OUT22: D37.A D41.C J11.1 U13.P$27 U13.P$28 U13.P$29 U13.P$30
P_OUT23: D38.C D48.A J11.5 U15.P$27 U15.P$28 U15.P$29 U15.P$30
P_OUT24: D44.A D45.C J11.3 U14.P$27 U14.P$28 U14.P$29 U14.P$30
SLEW: JP1.2 U1.P$3 U2.P$3 U3.P$3
SLEW1: JP6.2 U5.P$3 U6.P$3 U7.P$3
SLEW2: JP11.2 U9.P$3 U10.P$3 U11.P$3
SLEW3: JP16.2 U13.P$3 U14.P$3 U15.P$3
VCC: C1.1 C2.1 C3.1 C4.1 C5.1 C6.1 C7.1 C8.1 C9.1 C15.1 C16.1 C17.1 D1.C D3.C D5.C D7.C D9.C D11.C J2.PWR J3.3 JP5.1 U1.P$4 U1.P$6 U1.P$11 U1.P$31 U2.P$4 U2.P$6 U2.P$11 U2.P$31 U3.P$4 U3.P$6 U3.P$11 U3.P$31 U4.VIN
VCC1: C19.1 C21.1 C22.1 C23.1 C24.1 C25.1 C26.1 C27.1 C28.1 C29.1 C30.1 C36.1 D13.C D15.C D18.C D20.C D22.C D24.C J4.PWR J6.3 JP10.1 U5.P$4 U5.P$6 U5.P$11 U5.P$31 U6.P$4 U6.P$6 U6.P$11 U6.P$31 U7.P$4 U7.P$6 U7.P$11 U7.P$31 U8.VIN
VCC2: C37.1 C39.1 C40.1 C41.1 C42.1 C43.1 C44.1 C45.1 C46.1 C47.1 C48.1 C54.1 D25.C D27.C D30.C D32.C D34.C D36.C J7.PWR J9.3 JP15.1 U9.P$4 U9.P$6 U9.P$11 U9.P$31 U10.P$4 U10.P$6 U10.P$11 U10.P$31 U11.P$4 U11.P$6 U11.P$11 U11.P$31 U12.VIN
VCC3: C55.1 C57.1 C58.1 C59.1 C60.1 C61.1 C62.1 C63.1 C64.1 C65.1 C66.1 C72.1 D37.C D39.C D42.C D44.C D46.C D48.C J10.PWR J12.3 JP20.1 U13.P$4 U13.P$6 U13.P$11 U13.P$31 U14.P$4 U14.P$6 U14.P$11 U14.P$31 U15.P$4 U15.P$6 U15.P$11 U15.P$31 U16.VIN